# Altium PCB I_measurement_lut.PcbDoc
Units mm, origin at the board's own origin, x right, y up, seen from the top; angles counter-clockwise.
Board outline 75 x 46 mm, 2 copper layers (Top Layer, Bottom Layer); 42 components, 36 nets, 228 pads, 64 vias.
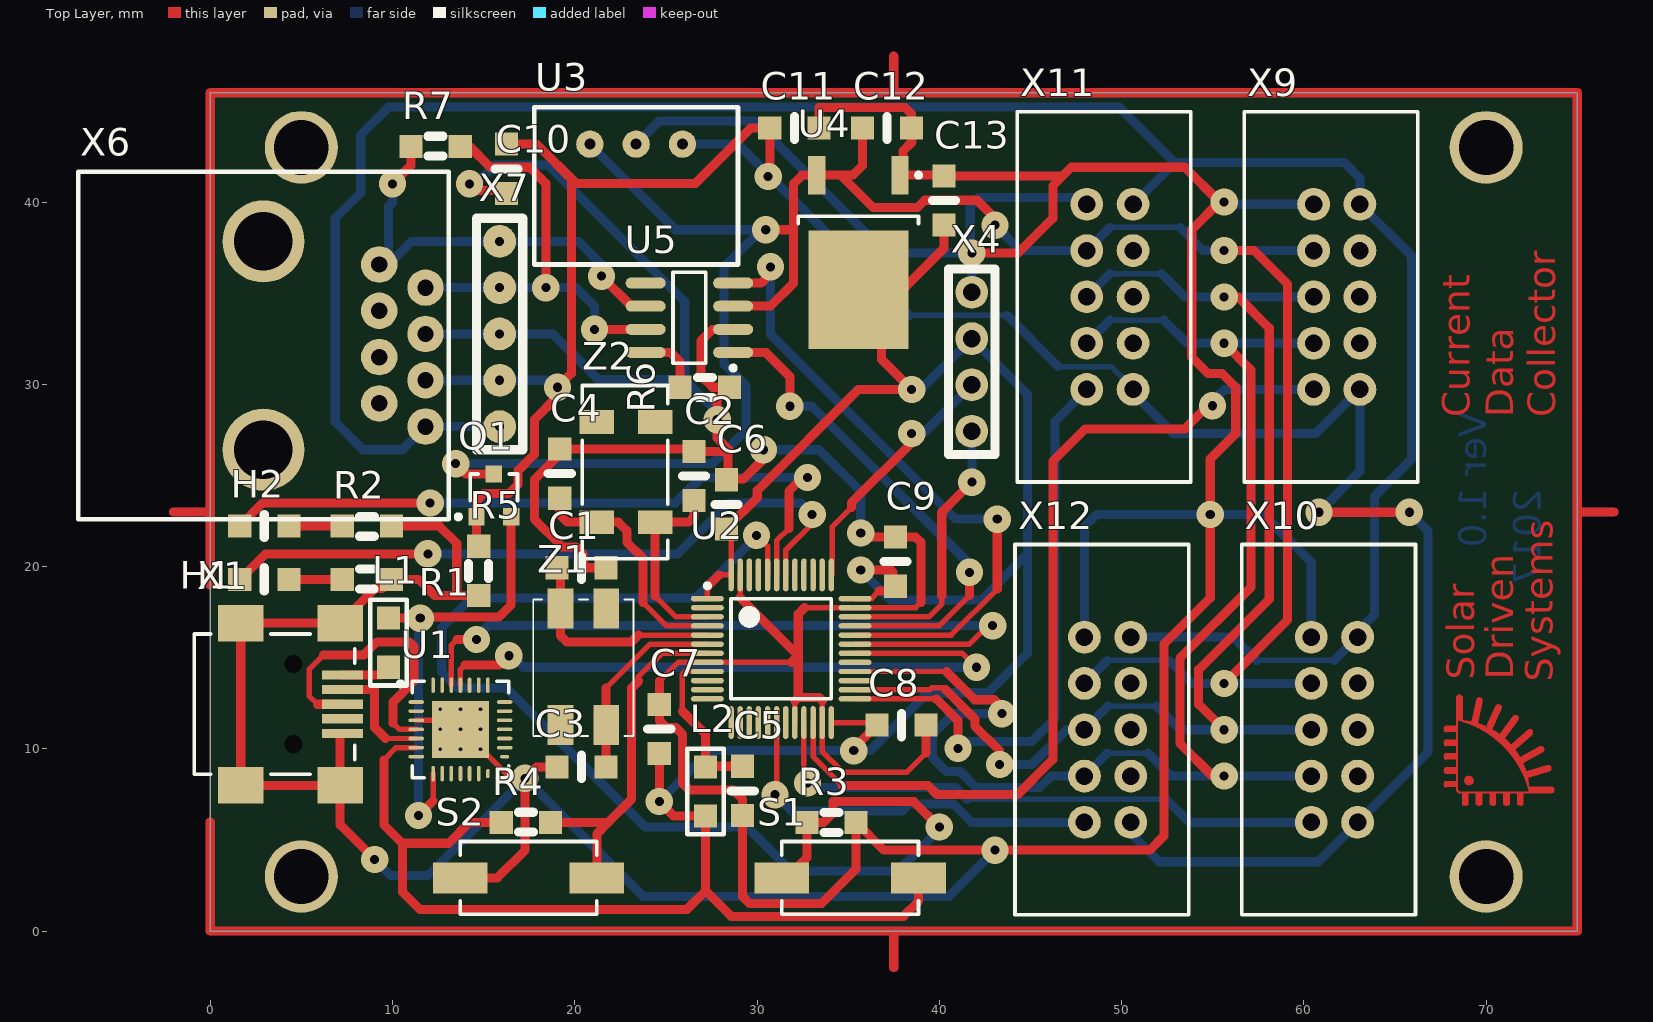
[diagram p0: Top Layer view]
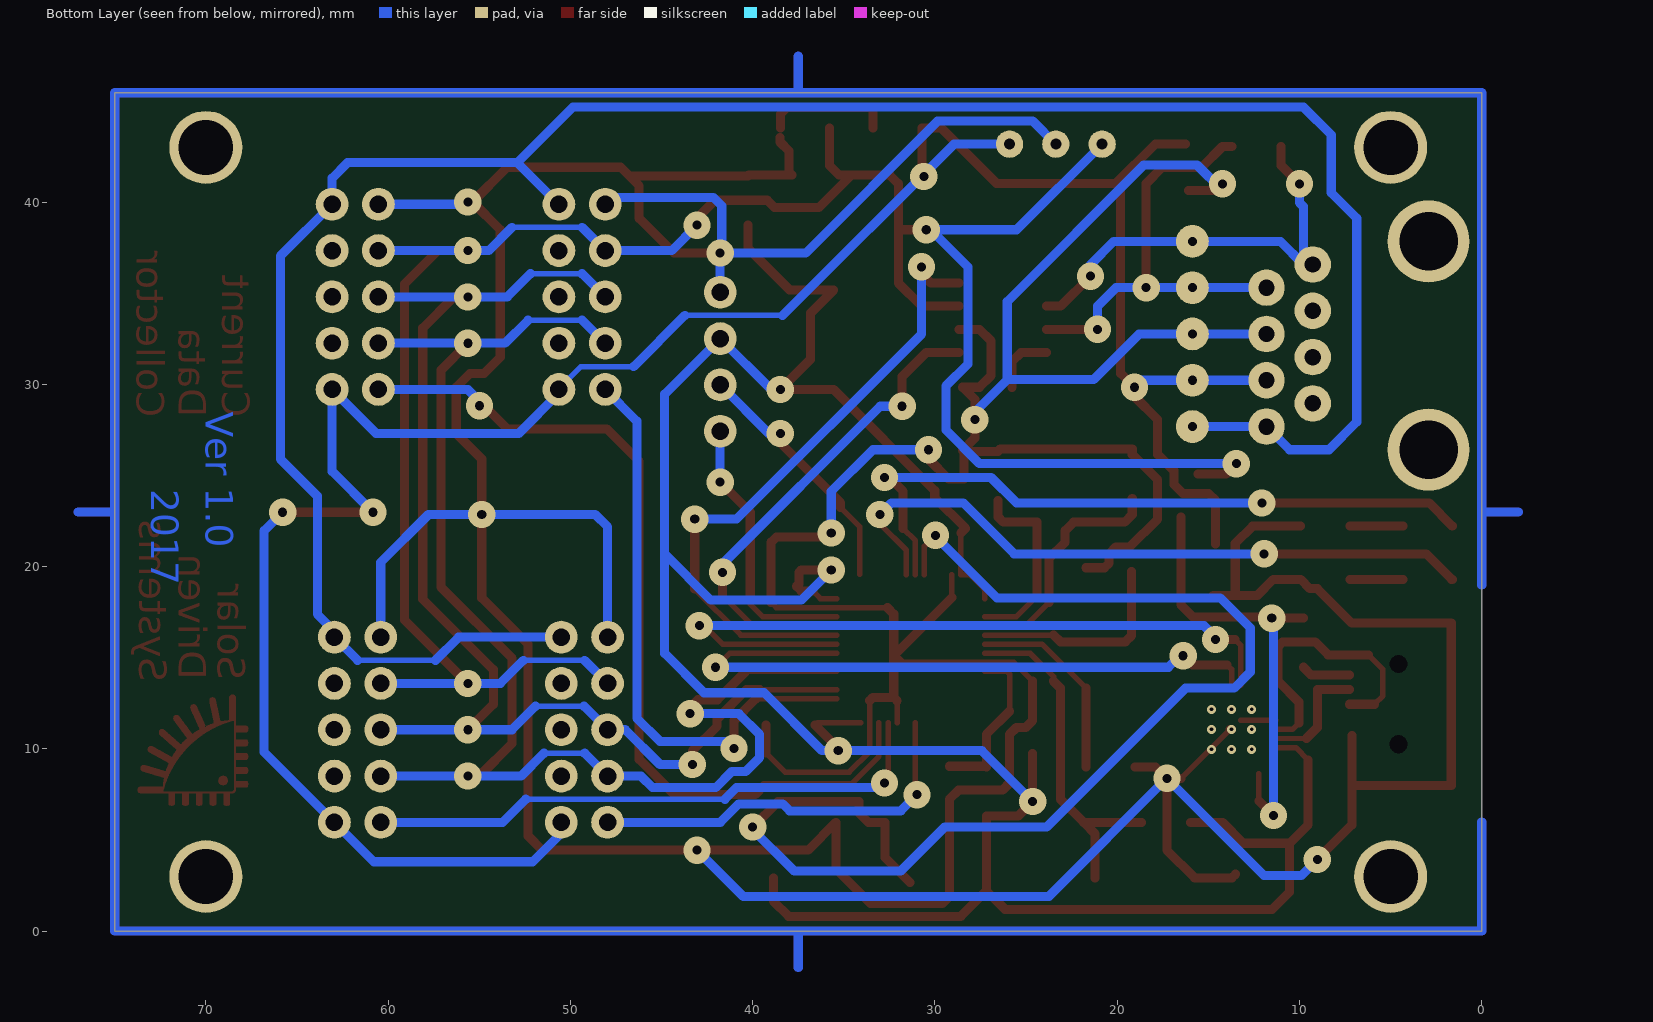
[diagram p1: Bottom Layer view, seen from below]
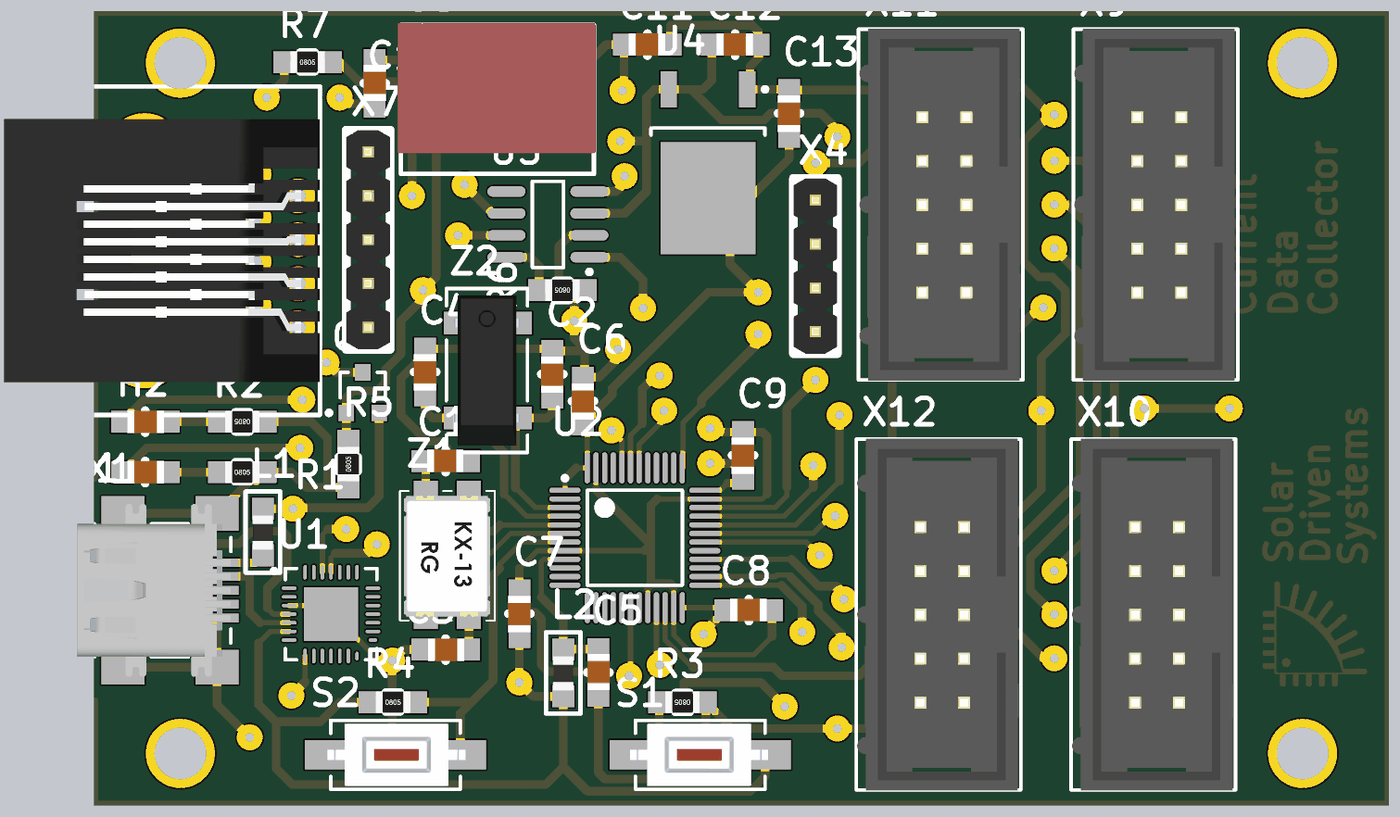
[diagram p2: 3D render of the assembled board from above, using the file's embedded part models]

## Layer stack, top to bottom
Top Solder: solder mask 0.0102, Solder Resist, Dk 3.5
Top Layer: signal copper 0.0356
Dielectric 1: dielectric 0.32, FR-4, Dk 4.8
Bottom Layer: signal copper 0.0356
Bottom Solder: solder mask 0.0102, Solder Resist, Dk 3.5

## Board outline
0,0 0,46 75,46 75,0 0,0

## Design rules (kind name [scope] priority, off if disabled: settings)
Clearance [All] p1: gap=0.2
PolygonConnect [All] p1: connectstyle=Relief reliefconductorwidth=0.254 reliefentries=4 polygonreliefangle="90 Angle" airgapwidth=0.254
RoutingVias [All] p1: holewidth=0.711 width=1.27 viastyle="Through Hole" minholewidth=0.711 minwidth=1.27 maxholewidth=0.711 maxwidth=1.27
SolderMaskExpansion [All] p1: expansion=0.102
Width [All] p1: maxlimit=1 minlimit=0.2 preferedwidth=0.3
30 further rules are at their usual default settings.

## Components (designator, comment, footprint, x,y, rotation, side; value= is the part's Value field where it differs from the comment)
C1 "22pF" C0805 21.717,19.939 r180 top
C2 "10pF" C0805 26.543,26.322 r270 top
C3 "22pF" C0805 19.017,9.017 r0 top
C4 "10pF" C0805 19.177,26.449 r270 top
C5 "100nF" C0805 29.21,6.35 r90 top
C6 "100nF" C0805 28.321,24.765 r270 top
C7 "100nF" C0805 24.638,12.446 r270 top
C8 "100nF" C0805 39.276,11.303 r180 top
C9 "100nF" C0805 37.592,21.623 r270 top
C10 "100nF" C0805 16.256,40.48 r90 top
C11 "100nF" C0805 33.401,44.069 r180 top
C12 "100nF" C0805 38.481,44.069 r180 top
C13 "100nF" C0805 40.259,41.435 r270 top
H1 "LED_SMD" C0805 1.618,19.304 r0 top
H2 "LED_SMD" C0805 1.618,22.225 r0 top
L1 "Inductance" L0805 9.779,14.478 r90 top
L2 "BLM" L0805 27.178,6.317 r90 top
Q1 "IRLML6401" sot-23 15.56,23.908 r0 top
R1 "Resistor" R0805 7.239,19.304 r0 top
R2 "Resistor" R0805 9.939,22.225 r180 top
R3 "Resistor" R0805 35.433,5.969 r180 top
R4 "Resistor" R0805 15.969,5.969 r0 top
R5 "Resistor" R0805 14.732,18.415 r90 top
R6 "10K" R0805 28.481,29.845 r180 top
R7 "120" R0805 11.016,43.053 r0 top
S1 "Tact_switch" Tact_switch_smd 38.862,2.921 r180 top
S2 "Tact_switch" Tact_switch_smd 13.709,2.921 r0 top
U1 "CP2102-GM" SLAB-QFN-28-3125x3125TP_N 13.728,11.072 r0 top
U2 "STM32F103C8T6" LQFP48_N 31.325,15.497 r0 top
U3 "DC/DC 5v" "DC/DC R-78E" 25.908,43.18 r180 top
U4 "LD1117ADT12TR" TO-252_N 35.56,37.229 r270 top
U5 "MCP2551-I/SN" SOIC-SN8_N 26.289,33.655 r180 top
X1 "miniUSB" miniUSB 1.472,12.452 r270 top
X4 "Pins 4x2.54" "Pins 4x2.54" 41.783,27.432 r90 top
X6 "RJ45" RJ45 9.271,36.576 r270 top
X7 "Pins 5x2.54" "Pins 5x2.54" 15.875,37.846 r270 top
X9 "IDC-10" IDC-10 63.075,29.721 r0 top
X10 "IDC-10" IDC-10 62.948,5.972 r0 top
X11 "IDC-10" IDC-10 50.629,29.721 r0 top
X12 "IDC-10" IDC-10 50.502,5.972 r0 top
Z1 "12 MHz" "kx 13 12MHz" 21.717,17.703 r270 top
Z2 "32.768kHz" "Geyer KX - 327S 32.768kHz" 24.409,22.44 r90 top

## Footprints (in the part's own frame and the unit in brackets; to place one, negate y for a bottom-side part, rotate by r counter-clockwise, add the part's x,y. Pads: shape width x height; smd on the part's side, far side on the other; paste and mask are expansions set on the pad)
C0805 [mm]
  rect 1.27x1.27 smd: 1(0,0) 2(2.7,0)
  silkscreen extent 1.35,-0.63 1.35,0.64, body extent 0.32,-0.66 2.42,0.64, height 0.51
"DC/DC R-78E" [mm]
  round 1.5 hole 0.6: 1(0,0) 2(2.54,0) 3(5.08,0)
  silkscreen extent -3.05,-2.03 8.13,6.6, body extent -3.16,-2.13 8.34,5.42, height 3.18
"Geyer KX - 327S 32.768kHz" [mm]
  rect 1.3x1.9 smd: 1(0,0) 2(0,3.2) 3(5.5,3.2) 4(5.5,0)
  silkscreen extent -2,-0.7 7.5,4, body extent -1.6,-0.25 7.1,3.55, height 2.51
IDC-10 [mm]
  round 1.8 hole 0.96: 1(0,0) 2(-2.54,0) 3(0,2.54) 4(-2.54,2.54) 5(0,5.08) 6(-2.54,5.08) 7(0,7.62) 8(-2.54,7.62) 9(0,10.16) 10(-2.54,10.16)
  silkscreen extent -6.35,-5.08 3.17,15.24, body extent -6.3,-5.12 3.05,15.28, height 9.25
"kx 13 12MHz" [mm]
  rect 2.2x1.4 smd: 1(0,-2.5) 2(6.4,-2.5) 3(6.4,0) 4(0,0)
  silkscreen extent -0.5,-4 7,1.5, body extent -0.22,-3.77 6.78,1.23, height 1.3
L0805 [mm]
  rect 1.27x1.27 smd: 1(0,0) 2(2.7,0)
  silkscreen extent -1,-1 3.7,1, body extent 0.32,-0.6 2.32,0.6
LQFP48_N [mm] "Thin QFP, 48-Leads, Body 7x7mm, Pitch 0.5mm, IPC Medium Density"
  oval 1.8x0.3 smd: 1(-4.05,2.75) 2(-4.05,2.25) 3(-4.05,1.75) 4(-4.05,1.25) 5(-4.05,0.75) 6(-4.05,0.25) 7(-4.05,-0.25) 8(-4.05,-0.75) 9(-4.05,-1.25) 10(-4.05,-1.75) 11(-4.05,-2.25) 12(-4.05,-2.75) 25(4.05,-2.75) 26(4.05,-2.25) 27(4.05,-1.75) 28(4.05,-1.25) 29(4.05,-0.75) 30(4.05,-0.25) 31(4.05,0.25) 32(4.05,0.75) 33(4.05,1.25) 34(4.05,1.75) 35(4.05,2.25) 36(4.05,2.75)
  oval 0.3x1.8 smd: 13(-2.75,-4.05) 14(-2.25,-4.05) 15(-1.75,-4.05) 16(-1.25,-4.05) 17(-0.75,-4.05) 18(-0.25,-4.05) 19(0.25,-4.05) 20(0.75,-4.05) 21(1.25,-4.05) 22(1.75,-4.05) 23(2.25,-4.05) 24(2.75,-4.05) 37(2.75,4.05) 38(2.25,4.05) 39(1.75,4.05) 40(1.25,4.05) 41(0.75,4.05) 42(0.25,4.05) 43(-0.25,4.05) 44(-0.75,4.05) 45(-1.25,4.05) 46(-1.75,4.05) 47(-2.25,4.05) 48(-2.75,4.05)
  silkscreen extent -4.17,-2.75 2.75,3.57, body extent -3.5,-3.5 3.5,3.5, height 1.6
miniUSB [mm]
  rect 0.5x2.25 smd: 1(-1.6,5.775) 2(-0.8,5.775) 3(0,5.775) 4(0.8,5.775) 5(1.6,5.775)
  rect 2x2.5 smd: 6(-4.45,5.65) 7(4.45,5.65) 8(-4.45,0.2) 9(4.45,0.2)
  rect 0x0 hole 1 unplated: ""(-2.2,3.1) ""(2.2,3.1)
  silkscreen extent -3.85,-2.35 3.85,6.45, body extent -5,-2.45 5,6.45, height 3.95
"Pins 4x2.54" [mm]
  round 1.8 hole 0.96: 1(0,0) 2(2.54,0) 3(5.08,0) 4(7.62,0)
  silkscreen extent -1.27,-1.27 8.89,1.27, body extent -1.27,-1.27 8.89,1.27, height 8.81
"Pins 5x2.54" [mm]
  round 1.8 hole 0.5: 1(0,0) 2(2.54,0) 3(5.08,0) 4(7.62,0) 5(10.16,0)
  silkscreen extent -1.27,-1.27 11.43,1.27, body extent -1.27,-1.27 11.43,1.27, height 8.81
R0805 [mm]
  rect 1.27x1.27 smd: 1(0,0) 2(2.7,0)
  silkscreen extent 0.94,-0.53 1.75,0.56, body extent 0.35,-0.62 2.35,0.63, height 0.61
RJ45 [mm]
  round 2 hole 0.9: 1(0,0) 2(1.27,2.54) 3(2.54,0) 4(3.81,2.54) 5(5.08,0) 6(6.35,2.54) 7(7.62,0) 8(8.89,2.54)
  round 4.5 hole 3.21: 9(-1.27,-6.35) 10(10.16,-6.35)
  silkscreen extent -5.08,-16.51 13.97,3.81, body extent -3.17,-14.48 12.06,3.81, height 12.7
SLAB-QFN-28-3125x3125TP_N [mm] "QFN, 28-Leads, Body 5x5mm, Pitch 0.5mm, Thermal Pad 3.13x3.13mm, IPC Medium Density"
  oval 0.85x0.2 smd: 1(-2.425,1.5) 2(-2.425,1) 3(-2.425,0.5) 4(-2.425,0) 5(-2.425,-0.5) 6(-2.425,-1) 7(-2.425,-1.5) 16(2.425,-1) 17(2.425,-0.5) 18(2.425,0) 19(2.425,0.5) 20(2.425,1) 21(2.425,1.5)
  oval 0.2x0.85 smd: 8(-1.5,-2.425) 9(-1,-2.425) 10(-0.5,-2.425) 11(0,-2.425) 12(0.5,-2.425) 13(1,-2.425) 22(1.5,2.425) 23(1,2.425) 24(0.5,2.425) 25(0,2.425) 26(-0.5,2.425) 27(-1,2.425) 28(-1.5,2.425)
  oval 0.2x0.5 smd: 14(1.5,-2.425)
  oval 0.5x0.2 smd: 15(2.425,-1.5)
  rect 3.13x3.13 smd: 29(0,0)
  silkscreen extent -3.42,-2.65 2.65,2.65, body extent -2.5,-2.5 2.5,2.5, height 1
SOIC-SN8_N [mm] "SOIC, 8-Leads, Body 4.9x3.8mm, Pitch 1.27mm, IPC Medium Density"
  oval 2.2x0.6 smd: 1(-2.4,1.905) 2(-2.4,0.635) 3(-2.4,-0.635) 4(-2.4,-1.905) 5(2.4,-1.905) 6(2.4,-0.635) 7(2.4,0.635) 8(2.4,1.905)
  silkscreen extent -2.53,-2.5 0.9,2.88, body extent -2,-2.5 2,2.5, height 1.75
sot-23 [mm] "SOT-23; 3 Leads; Body 3.1 x 2.5 mm, inc. leads (LxW max)"
  rect 0.9x0.95 smd: 1(-0.95,-1.175) 2(0.95,-1.175) 3(0,1.175)
  silkscreen extent -2.07,-1.3 1.3,1.18
Tact_switch_smd [mm]
  rect 3x1.7 smd: 1(0,0) 2(7.5,0)
  silkscreen extent 0,-2 7.5,2, body extent -0.19,-1.8 7.81,1.8, height 2.51
TO-252_N [mm] "D-PAK, 4-Leads, Body 6.1x6.5mm, Pitch 2.28mm, Lead Span 9.7mm, IPC Medium Density"
  rect 2.1x0.95 smd: 1(-4.25,2.28) 3(-4.25,-2.28)
  rect 6.5x5.5 smd: 4(2.05,0)
  silkscreen extent -4.37,-3.3 -1.6,3.43, body extent -2,-3.3 4.2,3.3, height 2.4

## Part data
C1 C2 C3 C4 C5 C6 C7 C8 C9 C10 C11 C12 C13: library part Condensator
L2: library part Inductance
R6 R7: library part Resistor
U1: "Single-Chip USB to UART Bridge, 1024 Bytes EEPROM, -40 to 85 degC, 28-pin QFN, Tube"
U2: "STM32 ARM-based 32-bit MCU with 64 Kbytes Flash, 48-pin LQFP, Industrial Temperature"
U3: library part "DC/DC R-78E"
U4: "1A, Low Drop Positive Voltage Regulator, 1.2V, 3-Pin DPAK, Tape and Reel"
U5: "High-Speed CAN Transceiver, 8-Pin SOIC, Industrial Temperature"
Z1: library part "KX 13 Geyer"
Z2: library part "Crystal Oscillator"

## Free pads (board coordinates)
  round 4 hole 3: 2(5,43) 3(5,3) 6(70,3) 7(70,43)

## Via types
v1: diameter 1.5, hole 0.5, Top Layer to Bottom Layer, 55 vias
v2: diameter 0.5, hole 0.2, Top Layer to Bottom Layer, 9 vias

## Nets (pads, with @x,y where several pads share a name; then routed paths per layer and width w, separated by ;. In a path a pad name is that pad's centre, name@x,y a point inside that pad or via, vN(x,y) a via of type N, cw(c..) or ccw(c..) an arc to the next point about the centre after c; other vN are vias at no path point)
+3.3V: C6.2 C7.2 C8.2 C9.2 C13.2 L2.1 R4.1 S1.1 U1.6 U2.1 U2.24 U2.36 U2.48 U4.4 X4.3 | length 155.4
  Top Layer w0.3: 9.525,9.398 10.199,10.072 U1.6 ; U2.1 27.275,18.893 ; 27.929,19.547 U2.48 C6.2@28.575,21.844 ; U2.24 C8.2@36.432,11.447 ; U2.36 36.281,18.247 36.703,18.669
  Top Layer w0.5: 9.525,9.398 9.525,5.842 10.541,4.826 ; R4.1 14.224,5.969 13.081,4.826 10.541,4.826 ; C7.2 v1(24.638,7.112) 25.433,6.317 L2.1 27.178,2.222 ; 27.275,18.893 27.929,19.547 ; C6.2@28.575,21.844 28.321,22.098 30.013,23.79 30.013,24.171 35.56,29.718 v1(38.481,29.718) 36.83,31.369 36.83,33.909 U4.4 37.973,35.179 40.259,37.465 C13.2 ; v1(35.306,9.906) 35.306,10.033 C8.2 ; v1(35.687,19.812) 37.338,19.812 37.465,19.685 37.465,19.05 C9.2 37.338,18.669 36.703,18.669 ; S1.1 38.862,1.651 38.027,0.816 28.584,0.816 27.178,2.222 ; 10.541,4.826 10.541,2.159 11.5,1.2 26.156,1.2 27.178,2.222
  Bottom Layer w0.5: v1(24.638,7.112) 27.432,9.906 v1(35.306,9.906) 36.195,9.906 39.37,13.081 42.672,13.081 44.831,15.24 44.831,20.701 ; v1(35.687,19.812) 37.338,18.161 42.291,18.161 44.831,20.701 ; v1(38.481,29.718) 38.989,29.718 X4.3 44.831,29.464 44.831,20.701
+5V: C12.2 Q1.3 U3.3 U4.3 U5.3 X9.8 X10.8 X11.8 X12.8 | length 130.2
  Top Layer w0.5: v1(13.462,25.654) 14.033,25.083 Q1.3 ; U5.3 30.734,34.29 32.004,35.56 32.004,41.004 32.479,41.479 U4.3 34.594,41.479 ; v1(30.48,38.481) 31.877,38.481 ; C12.2 35.781,42.004 35.256,41.479 34.594,41.479 ; v1(43.053,38.735) 43.053,39.116 42.069,40.1 39.2,40.1 38.8,39.7 36.373,39.7 34.594,41.479 ; v1(55.626,13.589) 59.1,17.063 59.1,35.515 57.274,37.341 v1(55.626,37.341)
  Bottom Layer w0.3: 49.229,14.859 52.578,14.859 ; 49.356,38.608 53.213,38.608
  Bottom Layer w0.5: v1(13.462,25.654) 27.554,25.654 29.4,27.5 29.4,29.909 28.194,31.115 28.194,36.449 v1@30.226,38.481 ; U3.3 25.527,38.481 v1@30.226,38.481 ; v1(30.48,38.481) v1@30.226,38.481 ; v1(43.053,38.735) 44.447,37.341 X11.8 49.356,38.608 ; X12.8 49.229,14.859 ; 52.578,14.859 53.845,13.592 X10.8 ; 53.213,38.608 54.48,37.341 v1(55.626,37.341) X9.8
+5VUSB: L1.2 Q1.2 U1.8 | length 25.4
  Top Layer w0.3: 12.228,7.148 U1.8
  Top Layer w0.5: L1.2 v1(11.524,17.178) 11.575,17.229 15.832,17.229 16.51,17.907 Q1.2 ; v1(11.43,6.35) 12.228,7.148
  Bottom Layer w0.5: v1(11.43,6.35) 11.43,17.084 v1(11.524,17.178)
+12V: C10.2 C11.2 Q1.1 R5.2 U3.1 X6.6 X7.4 X9.1 X10.1 X11.1 X12.1 | length 140.9
  Top Layer w0.5: R5.2@14.61,21.237 Q1.1 14.61,23.627 14.986,24.003 16.383,24.003 16.891,24.511 16.891,25.273 17.78,26.162 17.78,28.067 19.05,29.337 v1(19.05,29.845) 19.812,30.607 19.812,41.021 20.066,41.021 ; C10.2 17.907,43.18 20.066,41.021 ; v1(30.607,41.402) 30.701,41.496 C11.2 29.669,44.069 26.621,41.021 20.066,41.021 ; v1(60.833,22.987) v1(65.786,22.987)
  Bottom Layer w0.3: 38.354,33.782 43.718,33.782 ; 46.529,30.971 49.429,30.971 50.679,29.721 X11.1 X11.1@50.1,29.721
  Bottom Layer w0.5: X6.6@12.319,30.226 X7.4 18.669,30.226 v1(19.05,29.845) ; U3.1 28.956,43.18 38.354,33.782 ; 43.718,33.782 46.529,30.971 ; X12.1 50.502,5.378 52.07,3.81 60.786,3.81 X10.1 66.802,9.826 66.802,21.971 v1(65.786,22.987) ; X11.1 50.629,29.508 52.832,27.305 60.659,27.305 X9.1 63.075,25.229 v1(60.833,22.987)
-12V: X6.8 X7.5 X9.9 X10.9 X11.9 X12.9 | length 127.4
  Bottom Layer w0.3: 57.404,14.859 61.675,14.859
  Bottom Layer w0.5: X6.8 10.541,26.416 8.382,26.416 6.858,27.94 6.858,39.116 8.255,40.513 8.255,43.688 9.779,45.212 49.864,45.212 52.912,42.164 ; X6.8@12.319,27.686 X7.5 ; X12.9 56.131,16.132 57.404,14.859 ; X11.9 52.912,42.164 ; 61.675,14.859 X10.9 62.948,16.466 63.881,17.399 63.881,23.876 65.913,25.908 65.913,37.043 X9.9 63.075,41.319 62.23,42.164 52.912,42.164
BOOT: R3.2 S1.2 U2.44 | length 69.8
  Top Layer w0.3: v1(29.972,21.717) 30.575,21.114 U2.44
  Top Layer w0.5: S1.2@31.362,2.667 32.733,4.038 R3.2 33.655,5.969 34.163,6.477 34.163,7.112 38.608,7.112 v1(40.005,5.715)
  Bottom Layer w0.5: v1(29.972,21.717) 30.035,21.717 26.606,18.288 14.351,18.288 12.704,16.641 12.704,14.22 13.589,13.335 16.256,13.335 23.876,5.715 29.464,5.715 31.877,3.302 37.719,3.302 v1@40.069,5.652
CAN_RX: U2.32 U5.4 | length 35.7
  Top Layer w0.3: U2.32 40.649,16.247 43.18,18.778
  Top Layer w0.5: U5.4 30.226,35.56 30.734,36.068 v1(30.734,36.449) ; 43.18,18.778 v1(43.18,22.606)
  Bottom Layer w0.5: v1(30.734,36.449) 30.734,32.766 40.894,22.606 v1(43.18,22.606)
CAN_TX: U2.33 U5.1 | length 27.4
  Top Layer w0.3: U2.33 39.988,16.747 41.656,18.415
  Top Layer w0.5: U5.1 30.48,31.75 31.8,30.43 v1(31.8,28.8) ; 41.656,18.415 v1(41.656,19.685)
  Bottom Layer w0.5: v1(31.8,28.8) 33,28.8 41.656,20.144 v1(41.656,19.685)
CANH: R7.2 U5.7 X6.2 X7.2 | length 24.5
  Top Layer w0.5: R7.2 14.224,43.053 15.367,41.91 17.526,41.91 18.415,41.021 v1(18.415,35.306) ; v1(21.082,33.02) U5.7
  Bottom Layer w0.5: X6.2@12.319,35.306 X7.2 v1(18.415,35.306) 20.066,35.306 21.082,34.29 v1(21.082,33.02)
CANL: R7.1 U5.6 X6.1 X7.1 | length 23.5
  Top Layer w0.5: v1(10,41) 11.016,42.016 R7.1 ; v1(21.463,35.941) 23.114,34.29 U5.6
  Bottom Layer w0.5: v1(10,41) 10,39.972 9.779,39.751 9.779,36.576 11.049,37.846 X7.1 20.193,37.846 21.463,36.576 v1(21.463,35.941)
CLK: U2.26 X9.6 X10.6 X11.6 X12.6 | length 70.2
  Top Layer w0.3: U2.26 39.482,13.247 39.582,13.347 40.247,13.347 40.347,13.247
  Top Layer w0.5: 40.347,13.247 41.953,11.641 41.953,11.247 43.307,9.893 v1(43.307,9.144) ; v1(55.626,11.052) 54.229,12.449 54.229,14.351 58.1,18.222 58.1,33.086 56.388,34.798 v1(55.626,34.798)
  Bottom Layer w0.3: 49.252,12.342 51.92,12.342 ; 49.356,36.068 52.197,36.068
  Bottom Layer w0.5: v1(43.307,9.144) 45.085,9.144 46.993,11.052 X12.6 49.252,12.342 ; X11.6 49.356,36.068 ; 51.92,12.342 53.21,11.052 v1(55.626,11.052) X10.6 ; 52.197,36.068 53.464,34.801 X9.6
CS1: U2.25 X11.2 | length 32.4
  Top Layer w0.3: U2.25 39.831,12.747
  Top Layer w0.5: 39.831,12.747 41.021,11.557 v1(41.021,10.033)
  Bottom Layer w0.5: v1(41.021,10.033) 41.402,10.414 45.085,10.414 46.355,11.684 46.355,27.987 X11.2
CS2: U2.22 X9.2 | length 49.1
  Top Layer w0.3: U2.22 33.075,9.597 34.671,8.001
  Top Layer w0.5: 34.671,8.001 39.37,8.001 39.871,7.5 44.3,7.5 46.228,9.428 46.228,25.781 48.006,27.559 53.467,27.559 54.737,28.829 v1(54.991,28.829)
  Bottom Layer w0.5: v1(54.991,28.829) 54.991,29.083 55.629,29.721 X9.2
CS3: U2.21 X10.2 | length 31.9
  Top Layer w0.3: v1@32.575,8.128 U2.21
  Bottom Layer w0.3: 41.529,7.239 52.451,7.239
  Bottom Layer w0.5: v1(32.766,8.128) 33.02,7.874 40.894,7.874 41.529,7.239 ; 52.451,7.239 53.718,5.972 X10.2
CS4: U2.18 X12.2 | length 21.9
  Top Layer w0.3: v1@31.075,7.58 U2.18
  Top Layer w0.5: v1(30.988,7.493) v1@31.075,7.58
  Bottom Layer w0.5: v1(30.988,7.493) 31.877,6.604 37.973,6.604 38.354,6.985 40.767,6.985 41.78,5.972 X12.2
GND: C1.1 C2.1 C3.1 C4.1 C5.1 C6.1 C7.1 C8.1 C9.1 C10.1 C11.1 C12.1 C13.1 R1.2 R2.1 R3.1 R5.1 R6.1 S2.1 U1.3 U1.29 U2.8 U2.20 U2.23 U2.35 U2.47 U3.2 U4.1 U5.2 X1.5 X1.6 X1.7 X1.8 X1.9 X4.4 X6.4 X7.3 X9.10 X10.10 X11.10 X12.10 | length 409.4
  Top Layer w0.3: U1.3 U1.29@13.228,11.572 ; U1.29@13.82,11.072 16.51,8.382 ; 24.638,13.716 25.669,14.747 U2.8 31.891,14.747 ; 29.075,18.297 U2.47 ; U2.20 32.075,12.644 ; 32.606,17.747 U2.35 38.702,17.747 38.989,18.034 ; 33.575,12.653 U2.23 33.575,9.859 34.706,8.728 38.228,8.728 39.276,9.776
  Top Layer w0.5: X1.5@7.122,10.727 X1.7 ; v1(9.017,3.937) 7.122,5.832 X1.7 ; R2.1 12.573,22.225 13.525,21.273 13.525,18.415 ; S2.1@13.501,3.129 S2.1 15.748,2.921 17.272,4.445 v1(17.272,8.382) ; v2(13.728,11.072) U1.29@13.82,11.072 ; v1@14.224,40.64 C10.1@16.096,40.64 ; R5.1 13.525,18.415 ; 16.51,8.382 v1(17.272,8.382) ; C3.1 17.907,9.017 v1(17.272,8.382) ; C1.1 20.701,19.939 20.447,20.193 20.447,20.701 20.066,21.082 19.304,21.082 17.78,22.606 17.78,24.765 19.177,26.162 C4.1 C2.1@26.416,26.449 ; 24.638,13.716 C7.1 24.638,11.557 25.019,11.176 25.527,11.176 25.908,10.795 25.908,8.128 26.289,7.747 28.702,7.747 29.21,7.239 C5.1 29.21,1.905 29.599,1.516 33.528,1.516 35.433,3.421 R3.1 36.957,4.445 v1(43.053,4.445) 51.545,4.445 52.324,5.224 52.324,15.748 54.864,18.288 v1(54.864,22.86) 54.864,25.908 56.261,27.305 56.261,29.845 55.499,30.607 54.737,30.607 53.848,31.496 53.848,38.481 55.372,40.005 53.467,41.91 47.244,41.91 46.769,41.435 ; C2.1 28.415,26.322 28.415,24.798 29.243,24.798 30.353,25.908 v1(30.353,26.416) ; 28.481,26.388 27.813,27.056 v1(27.813,28.067) 27.813,29.177 R6.1 27.559,29.845 26.924,30.48 26.924,32.385 27.559,33.02 U5.2 ; 29.075,18.297 32.258,15.114 ; 31.891,14.747 32.258,15.114 ; 32.075,12.644 32.258,12.827 ; 32.606,17.747 32.258,17.399 32.258,15.114 ; C11.1 33.401,45.2 38.112,45.2 38.481,44.831 C12.1 ; 33.575,12.653 33.401,12.827 32.258,12.827 ; v1(35.687,21.844) 35.56,21.844 35.339,21.623 C9.1 38.702,21.623 38.989,21.336 38.989,18.034 ; C12.1@38.5,43.542 38.5,43.3 38,42.8 38,41.639 U4.1 40.215,41.479 C13.1 46.769,41.435 ; 39.276,9.776 C8.1 ; v1(41.783,37.211) 44.323,37.211 46.228,39.116 46.228,40.894 46.769,41.435 ; X1.7 X1.9 X1.8 X1.6 9.017,18.797 9.432,18.797 R1.2 11.43,19.304 12.319,18.415 13.525,18.415 ; 32.258,12.827 32.258,15.114
  Bottom Layer w0.5: v1(9.017,3.937) 9.906,3.048 11.938,3.048 v1(17.272,8.382) 23.749,1.905 40.513,1.905 v1(43.053,4.445) ; X6.4@12.319,32.766 X7.3 18.796,32.766 21.303,30.259 26.035,30.259 ; v1@14.224,40.64 15.621,42.037 18.542,42.037 26.035,34.544 26.035,30.259 ; U3.2 24.638,44.45 29.85,44.45 37.1,37.2 v1@41.783,37.2 ; v1(27.813,28.067) 27.813,28.481 26.035,30.259 ; v1(30.353,26.416) 33.401,26.416 35.687,24.13 v1(35.687,21.844) ; v1@41.7,37.211 41.7,39.795 42.164,40.259 47.711,40.259 X11.10 ; X4.4 v1@41.783,37.2 ; X12.10 47.962,22.181 48.641,22.86 v1(54.864,22.86) 57.785,22.86 60.408,20.237 X10.10 ; v1@55.496,39.881 X9.10 ; v1@41.783,37.2 41.9,37.2 42.101,37.401 41.783,37.719 v1(41.783,37.211) v1@41.783,37.2
  other v1: 55.626,40.005 14.224,41
  other v2: 12.628,9.972 13.728,9.972 14.828,9.972 12.628,11.072 14.828,11.072 12.628,12.172 13.728,12.172 14.828,12.172
MISO: U2.28 X9.4 X10.4 X11.4 X12.4 | length 78.1
  Top Layer w0.3: U2.28 40.386,14.247
  Top Layer w0.5: 40.386,14.247 41.933,12.7 43,12.7 43.434,12.266 v1(43.434,11.938) ; v1(55.626,8.512) 54.988,8.512 53.2,10.3 53.2,14.973 57.1,18.873 57.1,30.784 v1(55.626,32.258)
  Bottom Layer w0.3: 49.212,9.762 51.452,9.762 ; 49.356,33.528 52.324,33.528
  Bottom Layer w0.5: v1@43.18,11.938 40.767,11.938 39.624,10.795 39.624,9.525 40.386,8.763 41.148,8.763 42.037,7.874 45.493,7.874 46.131,8.512 X12.4 49.212,9.762 ; X11.4 49.356,33.528 ; 51.452,9.762 52.702,8.512 v1(55.626,8.512) X10.4 ; 52.324,33.528 53.591,32.261 X9.4
MOSI: U2.27
NetC1_2: C1.2 U2.5 Z1.1 | length 11.9
  Top Layer w0.3: 23.486,16.247 U2.5
  Top Layer w0.5: C1.2@19.217,19.739 Z1.1 19.217,16.216 19.558,15.875 23.114,15.875 23.486,16.247
NetC2_2: C2.2 U2.3 Z2.1 | length 10.5
  Top Layer w0.3: 24.409,18.39 25.552,17.247 U2.3
  Top Layer w0.5: 24.409,18.39 Z2.1 26.25,22.44 26.543,22.733 C2.2
NetC3_2: C3.2 U2.6 Z1.3 | length 10.9
  Top Layer w0.3: 21.717,13.335 24.129,15.747 U2.6
  Top Layer w0.5: C3.2 Z1.3 21.717,13.335
NetC4_2: C4.2 U2.4 Z2.2 | length 13.3
  Top Layer w0.3: 23.749,18.034 25.036,16.747 U2.4
  Top Layer w0.5: C4.2 19.177,22.86 19.597,22.44 Z2.2 22.391,22.44 22.86,21.971 22.86,21.336 23.749,20.447 23.749,18.034
NetC5_2: C5.2 L2.2 U2.9 | length 9.1
  Top Layer w0.3: 25.908,12.065 25.908,14.097 26.058,14.247 U2.9
  Top Layer w0.5: 25.908,12.065 27.178,10.795 L2.2 27.211,9.05 C5.2
NetH1_1: H1.1 U2.42 | length 37.3
  Top Layer w0.3: U2.42 31.575,20.907 v1@33.02,22.352
  Top Layer w0.5: H1.1 1.651,19.304 3.048,20.701 v1(11.938,20.701) ; v1@33.02,22.352 v1(33.02,22.86)
  Bottom Layer w0.5: v1(11.938,20.701) 25.654,20.701 28.448,23.495 32.385,23.495 v1(33.02,22.86)
NetH1_2: H1.2 R1.1 | length 2.9
  Top Layer w0.5: H1.2 R1.1
NetH2_1: H2.1 U2.43 | length 38.4
  Top Layer w0.3: U2.43 31.075,21.423 31.75,22.098
  Top Layer w0.5: H2.1 2.888,23.495 v1(12.065,23.495) ; 31.75,22.098 31.75,24.13 32.512,24.892 v1(32.766,24.892)
  Bottom Layer w0.5: v1(12.065,23.495) 25.527,23.495 26.924,24.892 v1(32.766,24.892)
NetH2_2: H2.2 R2.2 | length 2.9
  Top Layer w0.5: H2.2 R2.2
NetL1_1: L1.1 X1.1 | length 2.7
  Top Layer w0.5: X1.1 9.353,14.052 L1.1
NetR6_2: R6.2 U5.8 | length 3.5
  Top Layer w0.5: U5.8 25.273,31.75 25.781,31.242 R6.2
NetU1_4: U1.4 X1.3 | length 16
  Top Layer w0.3: 5.883,12.452 5.422,12.913 5.422,14.359 6.223,15.16 ; 10.033,11.43 10.391,11.072 U1.4
  Top Layer w0.5: 5.883,12.452 X1.3 ; 6.223,15.16 8.429,15.16 9.144,15.875 10.922,15.875 11.176,15.621 11.176,13.716 10.033,12.573 10.033,11.43
NetU1_5: U1.5 X1.2 | length 6.4
  Top Layer w0.3: 9.621,10.572 U1.5
  Top Layer w0.5: X1.2 9.02,13.252 9.02,11.173 9.621,10.572
RST: R4.2 S2.2 U2.7 | length 19.5
  Top Layer w0.3: 23.495,13.716 23.495,13.97 24.772,15.247 U2.7
  Top Layer w0.5: R4.2 21.844,5.969 ; S2.2 21.209,5.334 21.844,5.969 ; 23.495,13.716 23.114,13.335 23.114,7.239 21.844,5.969
SWC: U2.37 X4.2 | length 13.9
  Top Layer w0.3: U2.37@34.12,19.592 34.12,22.182 35.179,23.241
  Top Layer w0.5: 35.179,23.241 35.179,23.495 38.481,26.797 v1(38.481,27.305)
  Bottom Layer w0.5: v1(38.481,27.305) 39.116,27.305 X4.2
SWD: U2.34 X4.1 | length 15.4
  Top Layer w0.3: U2.34 39.447,17.247 40.132,17.932 40.132,18.415
  Top Layer w0.5: 40.132,18.415 40.132,22.987 v1(41.783,24.638) v1@41.783,24.765
  Bottom Layer w0.5: v1(41.783,24.638) X4.1
UART_RX: U1.26 U2.31 | length 40.5
  Top Layer w0.3: U1.26 13.228,15.688 13.542,16.002 ; U2.31 41.655,15.747 v1@42.926,17.018
  Top Layer w0.5: 13.542,16.002 v1(14.605,16.002)
  Bottom Layer w0.5: v1(14.605,16.002) 14.605,16.129 15.24,16.764 v1(42.926,16.764)
UART_TX: U1.25 U2.30 | length 36.7
  Top Layer w0.3: U1.25 13.728,14.363 13.97,14.605 ; U2.30 41.268,15.247 v1(42.037,14.478)
  Top Layer w0.5: 13.97,14.605 15.875,14.605 v1(16.383,15.113)
  Bottom Layer w0.5: v1(16.383,15.113) 16.557,15.113 17.192,14.478 v1(42.037,14.478)
pads on no net: U1.1 U1.2 U1.7 U1.9 U1.10 U1.11 U1.12 U1.13 U1.14 U1.15 U1.16 U1.17 U1.18 U1.19 U1.20 U1.21 U1.22 U1.23 U1.24 U1.27 U1.28 U2.2 U2.10 U2.11 U2.12 U2.13 U2.14 U2.15 U2.16 U2.17 U2.19 U2.29 U2.38 U2.39 U2.40 U2.41 U2.45 U2.46 U5.5 X1. X1.4 X6.3 X6.5 X6.7 X6.9 X6.10 X9.3 X9.5 X9.7 X10.3 X10.5 X10.7 X11.3 X11.5 X11.7 X12.3 X12.5 X12.7 Z1.2 Z1.4 Z2.3 Z2.4
copper on no net: | length 474
  Top Layer w0.5: -2,23 0,23 ; 0,6 0,0 75,0 75,46 0,46 0,19 ; 37.5,-2 37.5,0 ; 37.5,46 37.5,48 ; 75,23 77,23
  Bottom Layer w0.5: -2,23 0,23 ; 0,6 0,0 75,0 75,46 0,46 0,19 ; 37.5,-2 37.5,0 ; 37.5,46 37.5,48 ; 75,23 77,23

## Other copper
Top Layer:
  region: 5841 vertices and 6 holes, not listed, extent 67.682,6.89 73.743,12.97
  region: 211 vertices and 0 holes, not listed, extent 68.805,8.012 69.312,8.52
  text "Current" at 69.1,28.2 h1.5 r90
  text "Data" at 71.5,28.2 h1.5 r90
  text "Collector" at 73.8,28.2 h1.5 r90
  text "Solar" at 69.338,13.806 h1.5 r90
  text "Driven" at 71.497,13.806 h1.52 r90
  text "Systems" at 73.656,13.679 h1.52 r90
Bottom Layer:
  text "Ver 1.0" at 70,28.5 h1.5 r90
  text "2017" at 73,24.251 h1.5 r90

## Silkscreen, mask and mechanical layers (free items; w line width, h text height)
Mechanical 1:
  lines w0.2: 77,3 77,43